# Altium PCB AX301_AX4010.PcbDoc (part 4 of 10)
Units mm, origin at the board's own origin, x right, y up, seen from the top; angles counter-clockwise.
Board outline 131.7 x 91.8 mm, 4 copper layers (Top Layer, GND, Mid-Layer 1, Bottom Layer); 191 components, 338 nets, 1108 pads, 420 vias.
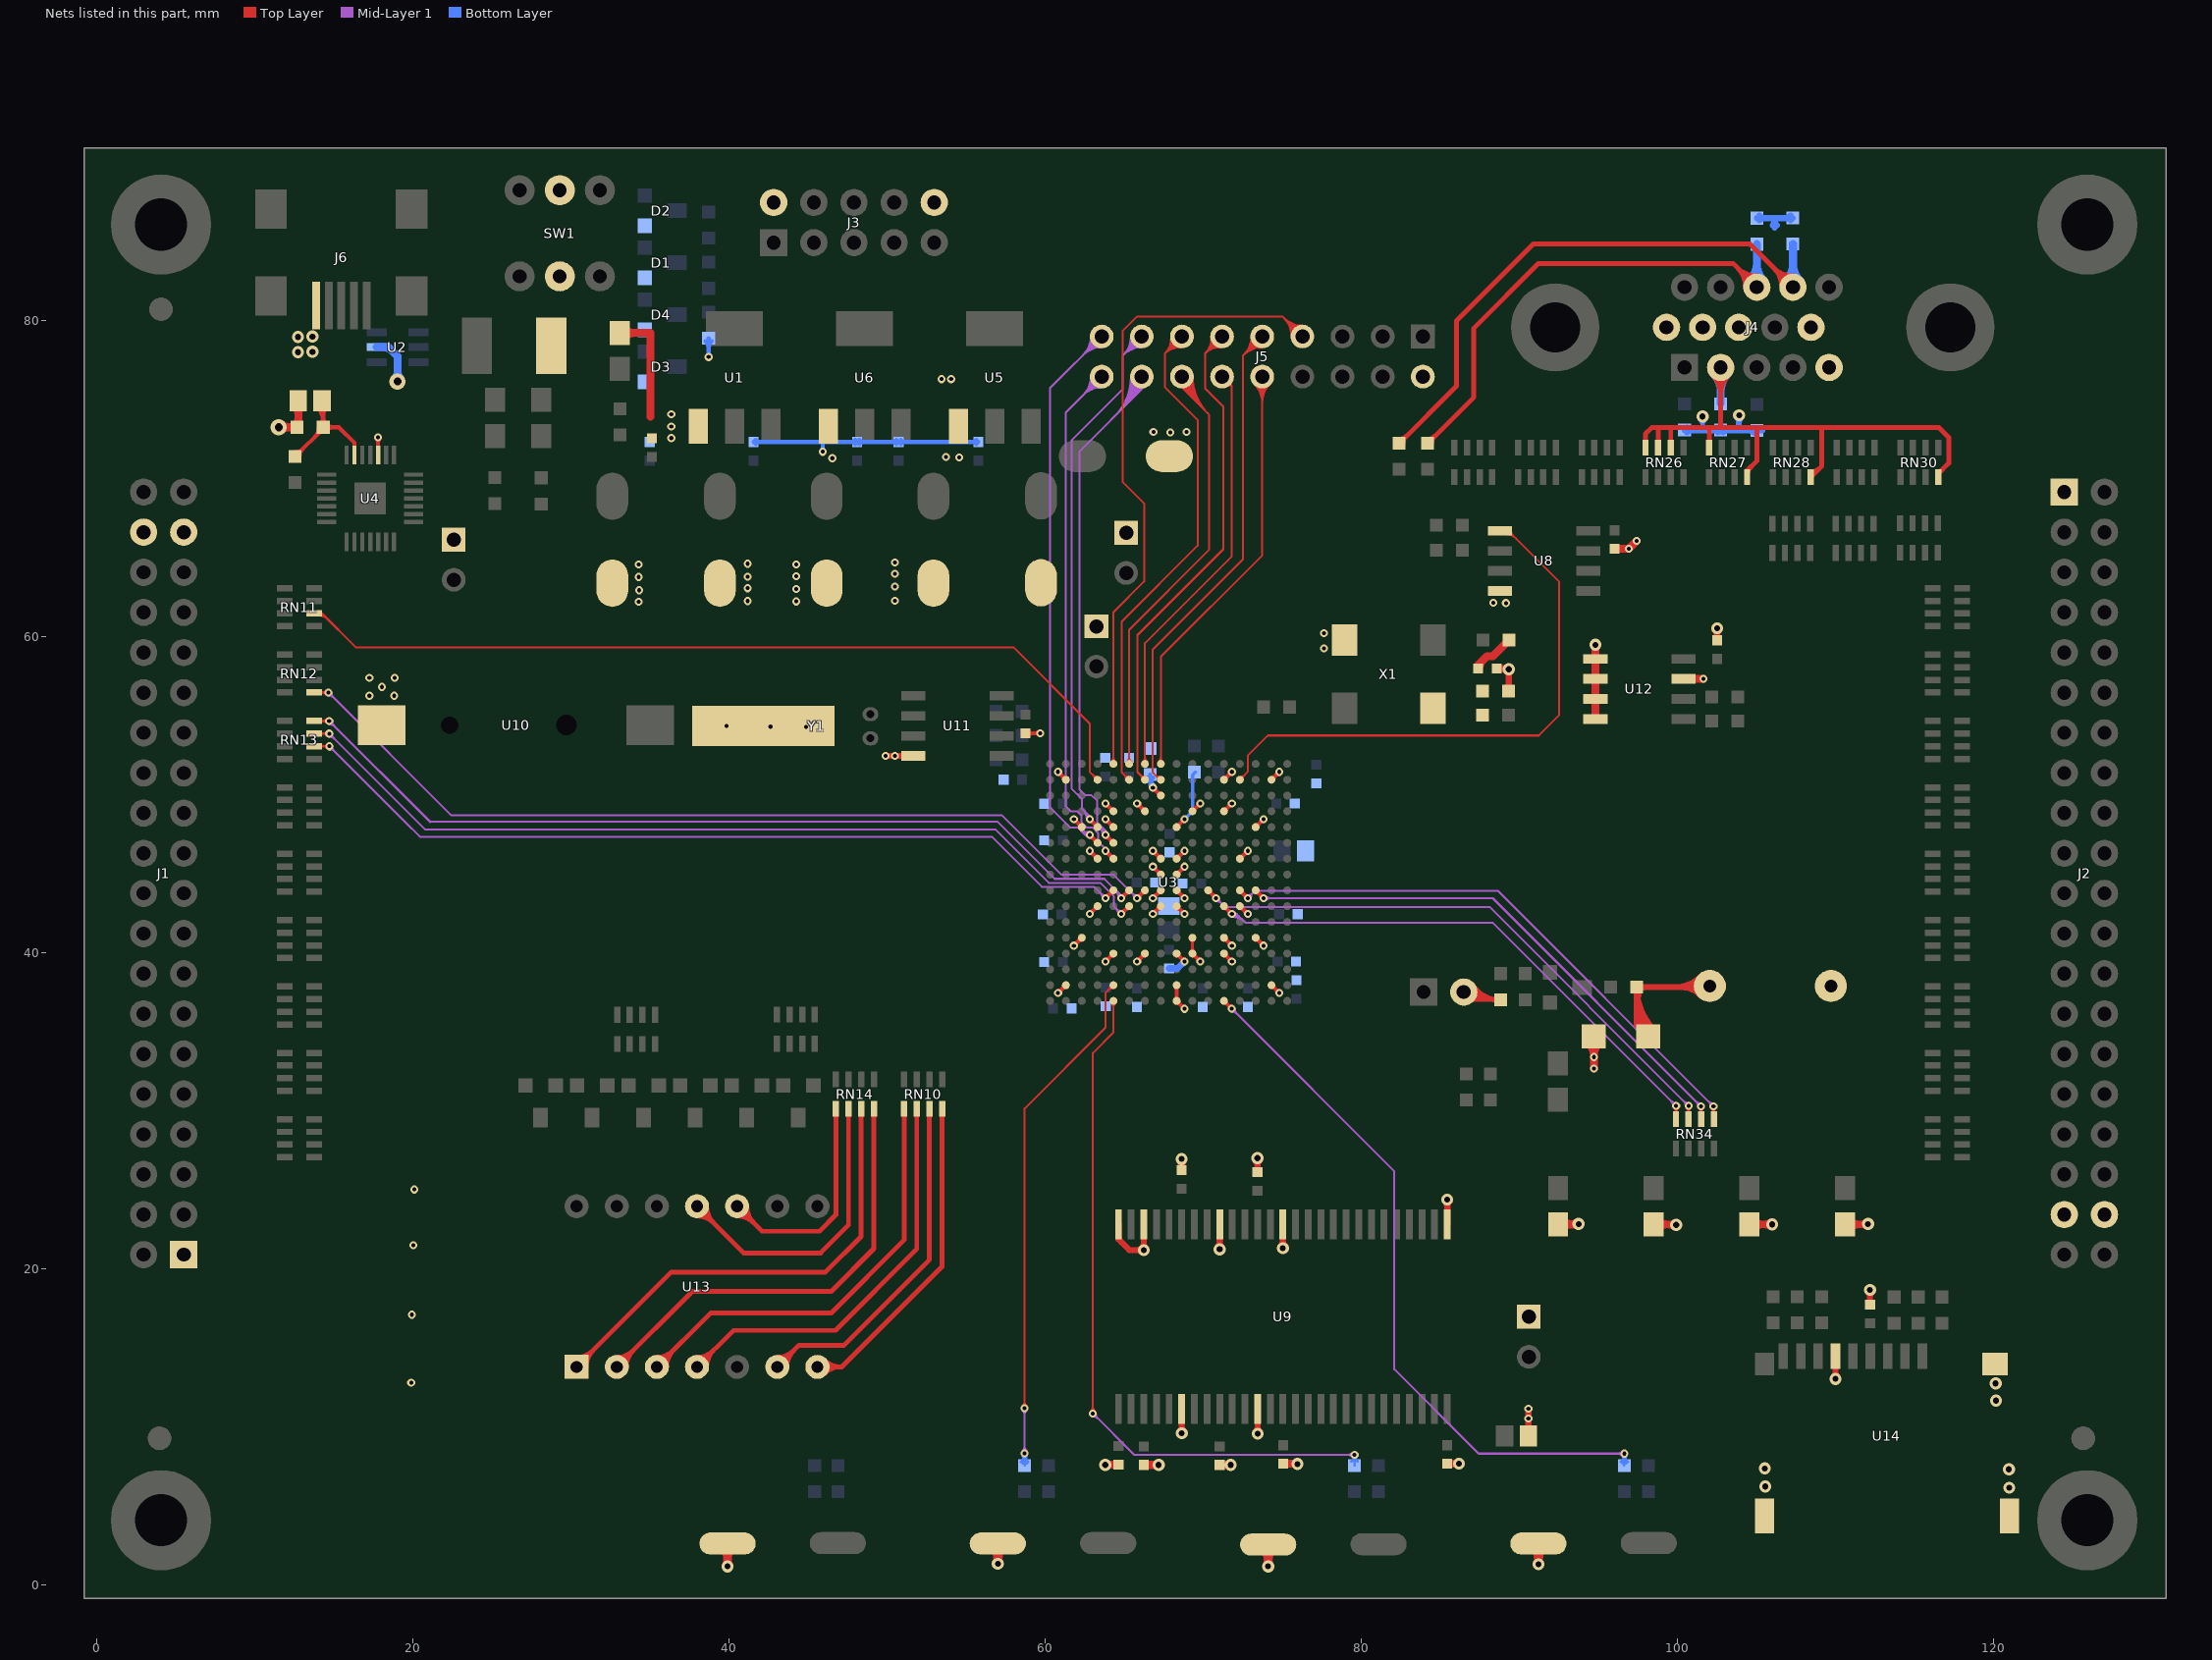
[diagram p6: the nets of this part, all layers, seen from the top]

## Via types
v1: diameter 0.508, hole 0.254, Top Layer to Bottom Layer, 377 vias
v2: diameter 0.762, hole 0.381, Top Layer to Bottom Layer, 41 vias
v3: diameter 1.016, hole 0.508, Top Layer to Bottom Layer, 2 vias

## Nets (pads, with @x,y where several pads share a name; then routed paths per layer and width w, separated by ;. In a path a pad name is that pad's centre, name@x,y a point inside that pad or via, vN(x,y) a via of type N, cw(c..) or ccw(c..) an arc to the next point about the centre after c; other vN are vias at no path point) (continued)
GND: C1.2 C2.2 C3.2 C4.2 C5.2 C6.2 C7.2 C8.2 C9.2 C10.2 C11.2 C12.2 C13.2 C14.2 C15.2 C16.2 C17.2 C18.2 C19.2 C20.2 C21.2 C22.2 C23.2 C24.1 C25.2 C26.2 C27.2 C28.2 C29.2 C30.2 C31.2 C32.2 C33.2 C34.2 C35.2 C36.2 C37.2 C38.2 C39.2 C40.2 C41.2 C42.2 C43.2 C44.2 C45.2 C46.2 C47.2 C48.2 C49.2 C50.2 D1.1 D2.1 D3.1 D4.1 D5.1 EC1.2 EC2.2 EC3.2 EC4.2 EC5.2 EC6.2 J1.1 J1.37 J1.38 J2.1 J2.37 J2.38 J3.2 J3.10 J4.5 J4.6 J4.7 J4.8 J4.10 J5.2 J6.5 K1.2 K2.2 K3.1 K4.2 LED0.2 LED1.2 LED2.2 LED3.2 LED6.2 LS1.2 P1.1 P2.1 P3.1 P4.1 R6.1 R12.2 U1.1 U2.2 U3.B2 U3.B15 U3.C5 U3.C12 U3.D7 U3.D10 U3.E2 U3.E4 U3.E12 U3.E13 U3.G4 U3.G12 U3.G13 U3.H7 U3.H8 U3.H9 U3.H10 U3.H13 U3.H15 U3.H16 U3.J7 U3.J8 U3.J9 U3.J10 U3.K4 U3.K13 U3.M4 U3.M5 U3.M13 U3.N7 U3.N10 U3.P5 U3.P12 U3.R2 U3.R15 U4.3 U5.1 U6.1 U8.4 U9.6 U9.12 U9.28 U9.41 U9.46 U9.52 U9.54 U10.2 U11.4 U12.1 U12.2 U12.3 U12.4 U12.7 U14.6 U14.11 U14.12 U14.13 X1.2 Y1.0 | length 213.2
  Top Layer w0.203: U3.G13@69.213,40.03 ccw(c68.96,40.283) 69.318,40.283 ccw(c69.676,40.283) U3.G13@69.423,40.03 ; U3.G12@69.213,40.82 cw(c68.96,40.566) 69.318,40.566 cw(c69.676,40.566) U3.G12@69.423,40.82 ; U3.G13@69.318,39.925 U3.G12@69.318,40.925
  Top Layer w0.254: v1@17.706,72.494 cw(c17.489,72.277) 17.796,72.277 cw(c18.103,72.277) v1@17.886,72.494 ; U4.3@17.796,71.476 v1(17.796,72.584) ; C36.2@58.75,53.867 v1(59.684,53.867) ; C36.2@58.885,53.732 cw(c59.21,53.407) 59.21,53.867 cw(c59.21,54.327) C36.2@58.885,54.002 ; v1@59.594,53.777 ccw(c59.377,53.561) 59.377,53.867 ccw(c59.377,54.174) v1@59.594,53.957 ; v1(60.818,37.425) U3.R15@61.318,37.925 ; v1@60.818,37.552 ccw(c60.818,37.858) 61.035,37.641 ccw(c61.252,37.425) v1@60.945,37.425 ; v1@60.818,51.298 cw(c60.818,50.991) 61.035,51.208 cw(c61.252,51.425) v1@60.945,51.425 ; v1(60.818,51.425) U3.R2@61.318,50.925 ; U3.R15@61.195,37.925 cw(c60.898,37.925) 61.108,37.715 cw(c61.318,37.505) U3.R15@61.318,37.802 ; U3.R2@61.195,50.925 ccw(c60.898,50.925) 61.108,51.135 ccw(c61.318,51.345) U3.R2@61.318,51.048 ; v1(61.818,40.425) U3.P12@62.318,40.925 ; v1@61.818,40.552 ccw(c61.818,40.858) 62.035,40.641 ccw(c62.252,40.425) v1@61.945,40.425 ; v1@61.818,48.298 cw(c61.818,47.991) 62.035,48.208 cw(c62.252,48.425) v1@61.945,48.425 ; v1(61.818,48.425) U3.P5@62.318,47.925 ; U3.P12@62.195,40.925 cw(c61.898,40.925) 62.108,40.715 cw(c62.318,40.505) U3.P12@62.318,40.802 ; U3.P5@62.195,47.925 ccw(c61.898,47.925) 62.108,48.135 ccw(c62.318,48.345) U3.P5@62.318,48.048 ; v1(62.818,42.425) U3.N10@63.318,42.925 ; v1@62.818,42.552 ccw(c62.818,42.858) 63.035,42.641 ccw(c63.252,42.425) v1@62.945,42.425 ; v1@62.818,46.298 cw(c62.818,45.991) 63.035,46.208 cw(c63.252,46.425) v1@62.945,46.425 ; v1(62.818,46.425) U3.N7@63.318,45.925 ; U3.N10@63.195,42.925 cw(c62.898,42.925) 63.108,42.715 cw(c63.318,42.505) U3.N10@63.318,42.802 ; U3.N7@63.195,45.925 ccw(c62.898,45.925) 63.108,46.135 ccw(c63.318,46.345) U3.N7@63.318,46.048 ; v1(63.818,39.425) U3.M13@64.318,39.925 ; v1@63.818,39.552 ccw(c63.818,39.858) 64.035,39.641 ccw(c64.252,39.425) v1@63.945,39.425 ; v1@63.818,48.298 cw(c63.818,47.991) 64.035,48.208 cw(c64.252,48.425) v1@63.945,48.425 ; v1(63.818,48.425) U3.M5@64.318,47.925 ; v1@63.818,49.298 cw(c63.818,48.991) 64.035,49.208 cw(c64.252,49.425) v1@63.945,49.425 ; v1(63.818,49.425) U3.M4@64.318,48.925 ; U3.M13@64.195,39.925 cw(c63.898,39.925) 64.108,39.715 cw(c64.318,39.505) U3.M13@64.318,39.802 ; U3.M5@64.195,47.925 ccw(c63.898,47.925) 64.108,48.135 ccw(c64.318,48.345) U3.M5@64.318,48.048 ; U3.M4@64.195,48.925 ccw(c63.898,48.925) 64.108,49.135 ccw(c64.318,49.345) U3.M4@64.318,49.048 ; v1(65.818,39.425) U3.K13@66.318,39.925 ; v1@65.818,39.552 ccw(c65.818,39.858) 66.035,39.641 ccw(c66.252,39.425) v1@65.945,39.425 ; v1@65.818,49.298 cw(c65.818,48.991) 66.035,49.208 cw(c66.252,49.425) v1@65.945,49.425 ; v1(65.818,49.425) U3.K4@66.318,48.925 ; U3.K13@66.195,39.925 cw(c65.898,39.925) 66.108,39.715 cw(c66.318,39.505) U3.K13@66.318,39.802 ; U3.K4@66.195,48.925 ccw(c65.898,48.925) 66.108,49.135 ccw(c66.318,49.345) U3.K4@66.318,49.048 ; v1(66.818,42.425) U3.J10@67.318,42.925 ; v1@66.818,42.552 ccw(c66.818,42.858) 67.035,42.641 ccw(c67.252,42.425) v1@66.945,42.425 ; v1(66.818,43.425) U3.J9@67.318,43.925 ; v1@66.818,43.552 ccw(c66.818,43.858) 67.035,43.641 ccw(c67.252,43.425) v1@66.945,43.425 ; v1@66.818,45.298 cw(c66.818,44.991) 67.035,45.208 cw(c67.252,45.425) v1@66.945,45.425 ; v1(66.818,45.425) U3.J8@67.318,44.925 ; v1@66.818,46.298 cw(c66.818,45.991) 67.035,46.208 cw(c67.252,46.425) v1@66.945,46.425 ; v1(66.818,46.425) U3.J7@67.318,45.925 ; U3.J10@67.195,42.925 cw(c66.898,42.925) 67.108,42.715 cw(c67.318,42.505) U3.J10@67.318,42.802 ; U3.J9@67.195,43.925 cw(c66.898,43.925) 67.108,43.715 cw(c67.318,43.505) U3.J9@67.318,43.802 ; U3.J8@67.195,44.925 ccw(c66.898,44.925) 67.108,45.135 ccw(c67.318,45.345) U3.J8@67.318,45.048 ; U3.J7@67.195,45.925 ccw(c66.898,45.925) 67.108,46.135 ccw(c67.318,46.345) U3.J7@67.318,46.048 ; U3.H16@68.231,37.012 ccw(c68.021,37.222) 68.318,37.222 ccw(c68.615,37.222) U3.H16@68.405,37.012 ; U3.H15@68.231,37.838 cw(c68.021,37.628) 68.318,37.628 cw(c68.615,37.628) U3.H15@68.405,37.838 ; U3.H16@68.318,36.802 cw(c68.318,36.505) 68.528,36.715 cw(c68.738,36.925) U3.H16@68.441,36.925 ; U3.H15@68.318,37.925 U3.H16@68.318,36.925 v1(68.818,36.425) ; U3.H13@68.318,39.802 cw(c68.318,39.505) 68.528,39.715 cw(c68.738,39.925) U3.H13@68.441,39.925 ; U3.H13@68.318,39.925 v1(68.818,39.425) ; U3.H10@68.318,42.802 cw(c68.318,42.505) 68.528,42.715 cw(c68.738,42.925) U3.H10@68.441,42.925 ; U3.H10@68.318,42.925 v1(68.818,42.425) ; U3.H9@68.318,43.802 cw(c68.318,43.505) 68.528,43.715 cw(c68.738,43.925) U3.H9@68.441,43.925 ; U3.H9@68.318,43.925 v1(68.818,43.425) ; U3.H8@68.318,44.925 v1(68.818,45.425) ; U3.H8@68.318,45.048 ccw(c68.318,45.345) 68.528,45.135 ccw(c68.738,44.925) U3.H8@68.441,44.925 ; U3.H7@68.318,45.925 v1(68.818,46.425) ; U3.H7@68.318,46.048 ccw(c68.318,46.345) 68.528,46.135 ccw(c68.738,45.925) U3.H7@68.441,45.925 ; v1@68.691,36.425 ccw(c68.384,36.425) 68.601,36.641 ccw(c68.818,36.858) v1@68.818,36.552 ; v1@68.691,39.425 ccw(c68.384,39.425) 68.601,39.641 ccw(c68.818,39.858) v1@68.818,39.552 ; v1@68.691,42.425 ccw(c68.384,42.425) 68.601,42.641 ccw(c68.818,42.858) v1@68.818,42.552 ; v1@68.691,43.425 ccw(c68.384,43.425) 68.601,43.641 ccw(c68.818,43.858) v1@68.818,43.552 ; v1@68.691,45.425 cw(c68.384,45.425) 68.601,45.208 cw(c68.818,44.991) v1@68.818,45.298 ; v1@68.691,46.425 cw(c68.384,46.425) 68.601,46.208 cw(c68.818,45.991) v1@68.818,46.298 ; U3.G13@69.318,39.802 cw(c69.318,39.505) 69.528,39.715 cw(c69.738,39.925) U3.G13@69.441,39.925 ; U3.G13@69.318,39.925 v1(69.818,39.425) ; U3.G4@69.318,48.925 v1(69.818,49.425) ; U3.G4@69.318,49.048 ccw(c69.318,49.345) 69.528,49.135 ccw(c69.738,48.925) U3.G4@69.441,48.925 ; v1@69.691,39.425 ccw(c69.384,39.425) 69.601,39.641 ccw(c69.818,39.858) v1@69.818,39.552 ; v1@69.691,49.425 cw(c69.384,49.425) 69.601,49.208 cw(c69.818,48.991) v1@69.818,49.298 ; U3.E13@71.318,39.802 cw(c71.318,39.505) 71.528,39.715 cw(c71.738,39.925) U3.E13@71.441,39.925 ; U3.E13@71.318,39.925 v1(71.818,39.425) ; U3.E12@71.318,40.802 cw(c71.318,40.505) 71.528,40.715 cw(c71.738,40.925) U3.E12@71.441,40.925 ; U3.E12@71.318,40.925 v1(71.818,40.425) ; U3.E4@71.318,48.925 v1(71.818,49.425) ; U3.E4@71.318,49.048 ccw(c71.318,49.345) 71.528,49.135 ccw(c71.738,48.925) U3.E4@71.441,48.925 ; U3.E2@71.318,50.925 v1(71.818,51.425) ; U3.E2@71.318,51.048 ccw(c71.318,51.345) 71.528,51.135 ccw(c71.738,50.925) U3.E2@71.441,50.925 ; v1@71.691,39.425 ccw(c71.384,39.425) 71.601,39.641 ccw(c71.818,39.858) v1@71.818,39.552 ; v1@71.691,40.425 ccw(c71.384,40.425) 71.601,40.641 ccw(c71.818,40.858) v1@71.818,40.552 ; v1@71.691,49.425 cw(c71.384,49.425) 71.601,49.208 cw(c71.818,48.991) v1@71.818,49.298 ; v1@71.691,51.425 cw(c71.384,51.425) 71.601,51.208 cw(c71.818,50.991) v1@71.818,51.298 ; U3.D10@72.318,42.802 cw(c72.318,42.505) 72.528,42.715 cw(c72.738,42.925) U3.D10@72.441,42.925 ; U3.D10@72.318,42.925 v1(72.818,42.425) ; U3.D7@72.318,45.925 v1(72.818,46.425) ; U3.D7@72.318,46.048 ccw(c72.318,46.345) 72.528,46.135 ccw(c72.738,45.925) U3.D7@72.441,45.925 ; v1@72.691,42.425 ccw(c72.384,42.425) 72.601,42.641 ccw(c72.818,42.858) v1@72.818,42.552 ; v1@72.691,46.425 cw(c72.384,46.425) 72.601,46.208 cw(c72.818,45.991) v1@72.818,46.298 ; U3.C12@73.318,40.802 cw(c73.318,40.505) 73.528,40.715 cw(c73.738,40.925) U3.C12@73.441,40.925 ; U3.C12@73.318,40.925 v1(73.818,40.425) ; U3.C5@73.318,47.925 v1(73.818,48.425) ; U3.C5@73.318,48.048 ccw(c73.318,48.345) 73.528,48.135 ccw(c73.738,47.925) U3.C5@73.441,47.925 ; v1@73.691,40.425 ccw(c73.384,40.425) 73.601,40.641 ccw(c73.818,40.858) v1@73.818,40.552 ; v1@73.691,48.425 cw(c73.384,48.425) 73.601,48.208 cw(c73.818,47.991) v1@73.818,48.298 ; U3.B15@74.318,37.802 cw(c74.318,37.505) 74.528,37.715 cw(c74.738,37.925) U3.B15@74.441,37.925 ; U3.B15@74.318,37.925 v1(74.818,37.425) ; U3.B2@74.318,50.925 v1(74.818,51.425) ; U3.B2@74.318,51.048 ccw(c74.318,51.345) 74.528,51.135 ccw(c74.738,50.925) U3.B2@74.441,50.925 ; v1@74.691,37.425 ccw(c74.384,37.425) 74.601,37.641 ccw(c74.818,37.858) v1@74.818,37.552 ; v1@74.691,51.425 cw(c74.384,51.425) 74.601,51.208 cw(c74.818,50.991) v1@74.818,51.298 ; LED1.2@98.51,22.784 v2@99.898,22.784 ; LED1.2@98.869,22.425 cw(c99.736,21.557) 99.736,22.784 cw(c99.736,24.01) LED1.2@98.869,23.143 ; 99.245,22.652 cw(c99.406,22.051) v2@99.774,22.553 ; 99.249,22.784 cw(c99.249,22.084) v2@99.744,22.579 ; 99.269,22.909 ccw(c99.449,23.58) v2@99.797,22.978 ; 99.372,22.784 ccw(c99.372,23.31) v2@99.744,22.938 ; 99.381,22.879 cw(c99.244,22.366) v2@99.704,22.631 ; 99.483,22.716 ccw(c99.389,23.067) v2@99.704,22.885 ; LED2.2@104.563,22.784 v2(105.994,22.784) ; LED2.2@104.923,22.425 cw(c105.79,21.557) 105.79,22.784 cw(c105.79,24.01) LED2.2@104.923,23.143 ; 105.265,22.643 cw(c105.47,21.877) v2@105.867,22.564 ; 105.265,22.924 ccw(c105.47,23.69) v2@105.867,23.004 ; 105.512,22.709 ccw(c105.4,23.127) v2@105.774,22.911 ; 105.512,22.858 cw(c105.4,22.441) v2@105.774,22.657 ; v2@105.815,22.604 ccw(c105.381,22.171) 105.381,22.784 ccw(c105.381,23.397) v2@105.815,22.963 ; LED3.2@110.617,22.784 v2@112.039,22.784 ; LED3.2@110.976,22.425 cw(c111.843,21.557) 111.843,22.784 cw(c111.843,24.01) LED3.2@110.976,23.143 ; 111.367,22.911 ccw(c111.534,23.534) v2@111.915,23.014 ; 111.388,22.662 cw(c111.575,21.961) v2@111.938,22.589 ; 111.39,22.784 ccw(c111.39,23.484) v2@111.885,22.989 ; 111.513,22.784 cw(c111.513,22.257) v2@111.885,22.63 ; 111.54,22.703 ccw(c111.411,23.187) v2@111.845,22.936 ; 111.642,22.838 cw(c111.556,22.515) v2@111.845,22.682
  Top Layer w0.381: v1(49.911,52.426) U11.4@51.664,52.426 ; U9.54@64.643,22.784 64.643,21.844 65.329,21.158 v2(66.243,21.158) U9.52@66.243,22.784 ; U9.54@64.668,22.047 ccw(c65.22,22.047) 64.83,21.657 ; v2@66.108,21.023 ccw(c65.783,20.698) 65.783,21.158 ccw(c65.783,21.618) 66.108,21.293 ccw(c65.784,21.618) 66.243,21.618 ; 66.243,21.619 ccw(c66.704,21.619) v2@66.378,21.293 ; v2@68.508,9.698 ccw(c68.183,10.024) 68.643,10.024 ccw(c69.103,10.024) v2@68.778,9.698 ; v2(68.643,9.564) U9.6@68.643,11.1 ; v2@73.308,9.674 ccw(c72.983,9.999) 73.443,9.999 ccw(c73.903,9.999) v2@73.578,9.674 ; v2(73.443,9.539) U9.12@73.443,11.1 ; v2@74.908,21.42 ccw(c74.583,21.745) 75.043,21.745 ccw(c75.503,21.745) v2@75.178,21.42 ; v2(75.043,21.285) U9.41@75.043,23.052 ; C46.2@89.179,56.693 ccw(c88.811,57.062) 89.332,57.062 ccw(c89.853,57.062) C46.2@89.484,56.693 ; v2@89.197,57.777 cw(c88.872,57.452) 89.332,57.452 cw(c89.792,57.452) v2@89.467,57.777 ; C46.2@89.332,56.54 v2(89.332,57.912) ; C50.2@90.578,9.398 v1(90.578,10.492) v1(90.578,11.127) ; LED0.2@92.456,22.784 v2@93.726,22.784 ; LED0.2@92.77,22.469 cw(c93.529,21.711) 93.529,22.784 cw(c93.529,23.857) LED0.2@92.77,23.098 ; 93.13,22.891 ccw(c93.299,23.523) v2@93.649,22.97 ; 93.222,22.701 cw(c93.37,22.148) v2@93.656,22.644 ; 93.23,22.784 ccw(c93.23,23.33) v2@93.617,22.944 ; 93.353,22.784 cw(c93.353,22.411) v2@93.617,22.674 ; 93.376,22.743 ccw(c93.286,23.078) v2@93.586,22.904 ; v2@109.874,13.141 ccw(c109.549,13.466) 110.009,13.466 ccw(c110.469,13.466) v2@110.143,13.141 ; v2(110.009,13.006) U14.6@110.009,14.448 ; v2@112.057,18.509 cw(c111.732,18.184) 112.192,18.184 cw(c112.652,18.184) v2@112.327,18.509 ; C43.2@112.192,17.71 v2(112.192,18.644)
  Top Layer w0.406: K1.2@39.552,2.24 cw(c38.704,1.391) 39.903,1.391 cw(c41.103,1.391) K1.2@40.255,2.24 ; v2@39.749,1.232 ccw(c39.188,1.556) 39.814,1.724 ; v2@39.778,1.269 ccw(c39.474,1.572) 39.903,1.572 ccw(c40.333,1.572) v2@40.029,1.269 ; v2(39.903,1.143) K1.2@39.903,2.591 ; 39.993,1.724 ccw(c40.619,1.556) v2@40.057,1.232 ; K2.2@56.655,2.24 cw(c55.807,1.391) 57.006,1.391 cw(c58.205,1.391) K2.2@57.357,2.24 ; v2@56.852,1.401 ccw(c56.42,1.651) 56.902,1.78 ; v2@56.88,1.438 ccw(c56.577,1.742) 57.006,1.742 ccw(c57.435,1.742) v2@57.132,1.438 ; v2(57.006,1.312) K2.2@57.006,2.591 ; 57.11,1.78 ccw(c57.592,1.651) v2@57.16,1.401 ; v2@70.918,21.335 ccw(c70.616,21.636) 71.043,21.636 ; v2(71.044,21.209) U9.46@71.043,22.784 ; 71.043,21.64 ccw(c71.475,21.64) v2@71.17,21.335 ; v2@73.306,26.849 cw(c73.002,26.546) 73.431,26.546 cw(c73.861,26.546) v2@73.557,26.849 ; C35.2@73.431,26.092 v2(73.431,26.975) ; K3.1@73.757,2.169 cw(c72.909,1.32) 74.109,1.32 cw(c75.308,1.32) K3.1@74.46,2.169 ; v2@73.955,1.232 ccw(c73.447,1.525) 74.013,1.677 ; v2@73.983,1.269 ccw(c73.679,1.572) 74.109,1.572 ccw(c74.538,1.572) v2@74.234,1.269 ; v2(74.109,1.143) K3.1@74.109,2.52 ; 74.204,1.677 ccw(c74.77,1.525) v2@74.263,1.232 ; v2@85.317,24.235 cw(c85.014,23.932) 85.443,23.932 cw(c85.872,23.932) v2@85.569,24.235 ; U9.28@85.443,22.784 v2(85.443,24.361) ; C3.2@88.576,57.963 89.281,57.963 v2(89.332,57.912) ; C3.2@88.78,57.963 cw(c88.78,57.36) v2@89.206,57.786 ; K4.2@90.86,2.24 cw(c90.012,1.391) 91.211,1.391 cw(c92.411,1.391) K4.2@91.563,2.24 ; v2@91.057,1.359 ccw(c90.593,1.627) 91.111,1.766 ; v2@91.086,1.396 ccw(c90.782,1.699) 91.211,1.699 ccw(c91.641,1.699) v2@91.337,1.396 ; v2(91.211,1.27) K4.2@91.211,2.591 ; 91.312,1.766 ccw(c91.83,1.627) v2@91.365,1.359 ; v2@102.389,60.377 cw(c102.085,60.074) 102.514,60.074 cw(c102.944,60.074) v2@102.64,60.377 ; C37.2@102.514,59.747 v2(102.514,60.503)
  Top Layer w0.5: v3(11.506,73.228) C1.2@12.675,73.228 12.749,73.228 C2.2@12.749,74.905 ; v3@11.689,73.046 cw(c12.129,72.605) 12.129,73.228 cw(c12.129,73.851) v3@11.689,73.411 ; C2.2@12.537,74.562 cw(c12.025,74.05) 12.749,74.05 cw(c13.474,74.05) C2.2@12.962,74.562 ; C1.2@12.564,73.339 ccw(c12.116,73.786) 12.749,73.786
  Top Layer w0.508: LED6.2@33.096,79.197 35.027,79.197 35.027,73.889 ; LED6.2@33.366,78.928 cw(c34.016,78.277) 34.016,79.197 cw(c34.016,80.117) LED6.2@33.366,79.467 ; v2@63.805,7.588 C30.2@64.643,7.588 ; C29.2@66.243,7.563 66.243,7.569 v2(67.183,7.569) ; C34.2@68.631,26.219 v2(68.631,26.924) ; C31.2@71.044,7.563 v2(71.736,7.563) ; C32.2@75.057,7.639 v2@75.965,7.639 ; C33.2@85.446,7.639 v2(86.176,7.639) ; D5.1@94.357,34.312 cw(c93.49,33.445) 94.717,33.445 cw(c95.943,33.445) D5.1@95.076,34.312 ; v1(94.717,32.639) v1(94.717,33.376) D5.1@94.717,34.671 ; U12.4@94.818,54.762 U12.3@94.818,56.032 U12.2@94.818,57.302 v2(94.818,59.461) ; C24.1@96.037,65.532 v1(96.926,65.532) v1(97.434,66.04) ; U12.7@100.406,57.302 v1(101.651,57.302)
  Bottom Layer w0.254: R6.1@38.512,78.669 cw(c38.035,78.192) 38.71,78.192 cw(c39.384,78.192) R6.1@38.907,78.669 ; v1@38.62,77.763 ccw(c38.403,77.98) 38.71,77.98 ccw(c39.016,77.98) v1@38.799,77.763 ; v1(38.71,77.673) R6.1@38.71,78.867 ; C45.2@41.554,72.295 45.923,72.295 ; C45.2@41.689,72.16 cw(c42.014,71.835) 42.014,72.295 cw(c42.014,72.755) C45.2@41.689,72.429 ; v1@45.833,71.769 ccw(c45.617,71.985) 45.923,71.985 ccw(c46.23,71.985) v1@46.013,71.769 ; v1(45.923,71.679) 45.923,72.295 ; C4.2@47.973,72.16 ccw(c47.648,71.835) 47.648,72.295 ccw(c47.648,72.755) C4.2@47.973,72.429 ; C4.2@48.242,72.16 cw(c48.568,71.835) 48.568,72.295 cw(c48.568,72.755) C4.2@48.242,72.429 ; C21.2@50.589,72.16 ccw(c50.264,71.835) 50.264,72.295 ccw(c50.264,72.755) C21.2@50.589,72.429 ; C21.2@50.859,72.16 cw(c51.184,71.835) 51.184,72.295 cw(c51.184,72.755) C21.2@50.859,72.429 ; C48.2@55.644,72.16 ccw(c55.318,71.835) 55.318,72.295 ccw(c55.318,72.755) C48.2@55.644,72.429 ; C48.2@55.778,72.295 C21.2@50.724,72.295 C4.2@48.108,72.295 45.923,72.295 ; v2@101.42,73.734 cw(c100.987,73.301) 101.6,73.301 cw(c102.213,73.301) v2@101.78,73.734 ; 101.6,73.025 v2(101.6,73.914)
  Bottom Layer w0.381: C38.2@100.482,73.025 101.6,73.025 103.886,73.025 ; C38.2@100.61,72.898 cw(c100.917,72.59) 100.917,73.025 ; C38.2@100.61,73.203 ccw(c101.04,73.633) 101.04,73.025 ; 102.16,73.025 ccw(c102.16,73.633) C39.2@102.59,73.203 ; 102.283,73.025 cw(c102.283,72.59) C39.2@102.59,72.898 ; C39.2@102.896,72.898 cw(c103.203,72.59) 103.203,73.025 ; C39.2@102.896,73.203 ccw(c103.326,73.633) 103.326,73.025 ; v2@103.777,73.855 cw(c103.513,73.592) 103.886,73.592 ; 103.886,73.469 cw(c104.433,73.469) v2@104.046,73.855 ; v2@103.886,73.965 103.886,73.025 ; C40.2@104.876,72.872 ccw(c104.508,72.504) 104.508,73.025 ccw(c104.508,73.546) C40.2@104.876,73.178 ; C41.2@105.029,86.462 106.159,86.462 ; C41.2@105.182,86.309 cw(c105.55,85.94) 105.55,86.462 cw(c105.55,86.983) C41.2@105.182,86.614 ; C40.2@105.385,73.025 C40.2@105.029,73.025 103.886,73.025 ; 106.025,85.999 ccw(c105.699,86.325) 106.159,86.325 ccw(c106.619,86.325) 106.294,85.999 ; 106.159,85.865 106.159,86.462 ; 106.732,86.462 ccw(c106.732,87.07) C42.2@107.162,86.64 ; 106.855,86.462 cw(c106.855,86.027) C42.2@107.162,86.334 ; C42.2@107.29,86.462 106.159,86.462
  Bottom Layer w0.406: C8.2@67.843,38.983 68.376,38.983 v1(68.818,39.425)
  Bottom Layer w0.5: U2.2@17.704,78.293 18.456,78.293 19.025,77.724 v3(19.025,76.124) ; U2.2@18.089,78.293 cw(c18.089,77.408) 18.715,78.034 ; v3@18.842,76.306 ccw(c18.402,76.747) 19.025,76.747 ccw(c19.647,76.747) v3@19.207,76.306
  other v1: 19.888,12.776 19.939,17.069 20.015,21.463 20.091,24.994 50.495,52.426 44.882,54.254 42.621,54.28 39.853,54.331 17.247,56.236 18.821,56.236 18.034,56.794 17.247,57.379 18.847,57.379 77.648,59.233 77.648,60.198 89.154,62.103 88.367,62.128 34.29,62.179 44.247,62.205 41.173,62.23 50.495,62.255 34.315,62.916 44.247,62.992 41.173,63.043 50.495,63.144 34.29,63.754 41.173,63.779 44.247,63.805 50.495,63.957 34.29,64.541 44.247,64.541 41.173,64.592 50.495,64.668 46.533,71.272 54.559,71.323 53.721,71.349 36.347,72.542 67.92,72.898 66.853,72.923 68.936,72.923 36.347,73.279 36.347,74.041 53.442,76.276 54.051,76.276
  other v2: 121.006,6.121 105.562,6.198 120.98,7.29 105.537,7.341 63.805,7.569 75.971,7.62 120.167,11.633 120.142,12.725 99.924,22.758 93.751,22.809 112.065,22.809 103.911,73.99 12.725,77.978 13.64,78.003 12.725,78.943 13.64,78.969
GREEN: C39.1 J4.2 RN26.2 RN26.3 RN26.4 RN27.4 RN27.8 RN28.8 RN30.8 | length 47.7
  Top Layer w0.305: RN26.4@97.984,71.933 97.984,72.813 98.374,73.203 105.029,73.203 ; RN26.3@98.784,71.933 98.784,73.156 ; RN26.2@99.584,71.933 99.584,73.194 ; RN27.4@102.016,71.933 102.016,73.161 ; J4.2@102.24,76.51 cw(c101.026,75.296) 102.743,75.296 cw(c104.46,75.296) J4.2@103.246,76.51 ; J4.2@102.456,76.725 cw(c101.762,76.032) 102.743,76.032 cw(c103.724,76.032) J4.2@103.03,76.725 ; 102.743,73.228 J4.2@102.743,77.013 ; RN27.8@104.416,70.075 104.416,70.481 105.029,71.095 105.029,73.203 ; RN27.8@104.463,70.375 cw(c104.836,70.375) 104.572,70.638 ; RN28.8@108.447,70.075 109.144,70.771 109.144,73.203 ; RN28.8@108.447,70.118 ccw(c108.447,70.221) RN28.8@108.52,70.148 ; RN28.8@108.447,70.422 ccw(c108.447,71.262) 109.04,70.668 ; RN30.8@116.51,70.075 116.51,70.294 117.17,70.955 117.17,72.593 116.561,73.203 109.144,73.203 ; RN30.8@116.51,70.422 ccw(c116.51,70.731) 116.728,70.513 ; 105.029,73.203 109.144,73.203
  Bottom Layer w0.508: J4.2@102.312,76.582 cw(c101.271,75.541) 102.743,75.541 cw(c104.215,75.541) J4.2@103.174,76.582 ; C39.1@102.743,74.752 J4.2@102.743,77.013
J1: J5.10 U3.J1 | length 34.2
  Top Layer w0.127: U3.J1@67.186,52.056 ccw(c66.868,52.375) 67.318,52.375 ccw(c67.768,52.375) U3.J1@67.45,52.056 ; U3.J1@67.318,51.925 67.318,58.707 73.736,65.126 J5.10@73.736,76.433 ; J5.10@73.251,75.948 cw(c72.079,74.776) 73.736,74.776 cw(c75.394,74.776) J5.10@74.222,75.948 ; J5.10@73.341,76.037 cw(c72.385,75.082) 73.736,75.082 cw(c75.087,75.082) J5.10@74.132,76.037 ; J5.10@73.43,76.127 cw(c72.692,75.389) 73.736,75.389 cw(c74.78,75.389) J5.10@74.042,76.127
J2: J5.9 U3.J2 | length 38.2
  Top Layer w0.127: U3.J2@67.132,50.911 ccw(c66.706,50.879) 66.98,51.207 ; U3.J2@67.298,51.11 cw(c67.253,51.535) 66.98,51.207 ; U3.J2@67.318,50.925 66.98,51.207 ; J5.9@73.05,78.973 cw(c71.392,78.973) 72.564,77.801 cw(c73.736,76.629) J5.9@73.736,78.287 ; J5.9@73.177,78.973 cw(c71.826,78.973) 72.781,78.018 cw(c73.736,77.063) J5.9@73.736,78.414 ; J5.9@73.304,78.973 cw(c72.26,78.973) 72.998,78.235 cw(c73.736,77.496) J5.9@73.736,78.541 ; J5.9@73.736,78.973 72.517,77.754 72.517,64.872 66.802,59.157 66.802,51.384 66.98,51.207
K1: J5.12 U3.K1 | length 28.3
  Top Layer w0.127: U3.K1@66.186,52.056 ccw(c65.868,52.375) 66.318,52.375 ccw(c66.768,52.375) U3.K1@66.45,52.056 ; U3.K1@66.318,51.925 66.318,59.562 71.806,65.049 71.806,75.823 ; J5.12@71.196,76.433 71.806,75.823 ; J5.12@71.561,75.851 cw(c71.666,75.683) 71.806,75.823 ; J5.12@71.778,76.069 ccw(c71.946,75.963) 71.806,75.823
K2: J5.11 U3.K2 | length 37.6
  Top Layer w0.127: U3.K2@66.132,50.925 ccw(c65.681,50.925) 66,51.243 ccw(c66.318,51.561) U3.K2@66.318,51.111 ; U3.K2@66.318,50.925 65.837,51.406 65.837,60.071 71.272,65.507 71.272,74.524 70.129,75.667 70.129,77.906 J5.11@71.196,78.973 ; J5.11@70.511,78.926 cw(c69.2,78.836) 70.129,77.906 cw(c71.059,76.977) J5.11@71.149,78.288 ; J5.11@70.638,78.935 cw(c69.569,78.861) 70.327,78.104 cw(c71.084,77.346) J5.11@71.158,78.415 ; J5.11@70.765,78.943 cw(c69.939,78.886) 70.524,78.301 cw(c71.11,77.715) J5.11@71.167,78.542
K9: RN12.5 U3.K9 | length 61.8
  Top Layer w0.127: RN12.5@13.745,56.442 v1(14.659,56.442) ; RN12.5@14.142,56.346 cw(c14.375,56.113) 14.375,56.442 cw(c14.375,56.772) RN12.5@14.142,56.539 ; v1@14.525,56.308 ccw(c14.199,55.982) 14.199,56.442 ccw(c14.199,56.902) v1@14.525,56.577
  Top Layer w0.254: v1(65.818,43.425) U3.K9@66.318,43.925 ; v1@65.818,43.552 ccw(c65.818,43.858) 66.035,43.641 ccw(c66.252,43.425) v1@65.945,43.425 ; U3.K9@66.195,43.925 cw(c65.898,43.925) 66.108,43.715 cw(c66.318,43.505) U3.K9@66.318,43.802
  Mid-Layer 1 w0.127: v1@14.659,56.252 cw(c14.659,55.792) 14.984,56.117 cw(c15.31,56.442) v1@14.85,56.442 ; v1(14.659,56.442) 22.435,48.666 57.277,48.666 61.036,44.907 64.335,44.907 v1(65.818,43.425) ; v1@65.627,43.425 ccw(c65.168,43.425) 65.493,43.75 ccw(c65.818,44.075) v1@65.818,43.615
KEY1: R44.1 U3.M15 | length 39.4
  Top Layer w0.127: v1@58.565,11.285 ccw(c58.239,11.611) 58.699,11.611 ccw(c59.159,11.611) v1@58.834,11.285 ; v1(58.699,11.151) 58.699,30.124 63.83,35.255 63.83,37.437 U3.M15@64.318,37.925 ; U3.M15@64.131,37.925 cw(c63.681,37.925) 64,37.606 cw(c64.318,37.288) U3.M15@64.318,37.738
  Mid-Layer 1 w0.127: v1@58.565,8.441 ccw(c58.239,8.766) 58.699,8.766 ccw(c59.159,8.766) v1@58.834,8.441 ; v1@58.565,11.016 cw(c58.239,10.691) 58.699,10.691 cw(c59.159,10.691) v1@58.834,11.016 ; v1(58.699,8.306) v1(58.699,11.151)
  Bottom Layer w0.152: R44.1@58.468,7.754 ccw(c57.926,8.306) v1(58.699,8.306) ; v1@58.55,8.209 cw(c58.246,8.013) 58.596,7.919 cw(c58.946,7.825) v1@58.78,8.148 ; v1@58.574,8.18 cw(c58.27,7.877) 58.699,7.877 cw(c59.129,7.877) v1@58.825,8.18 ; R44.1@58.575,7.645 ccw(c58.283,7.942) 58.699,7.942 ccw(c59.116,7.942) R44.1@58.824,7.645 ; v1@58.618,8.148 cw(c58.453,7.825) 58.803,7.919 cw(c59.153,8.013) v1@58.849,8.209 ; R44.1@58.699,7.518 v1(58.699,8.306) ; R44.1@58.931,7.754 cw(c59.473,8.306) v1(58.699,8.306)
KEY2: R40.1 U3.M16 | length 50.1
  Top Layer w0.127: v1@62.883,10.955 ccw(c62.557,11.28) 63.017,11.28 ccw(c63.477,11.28) v1@63.152,10.955 ; v1(63.017,10.82) 63.017,33.63 64.318,34.93 U3.M16@64.318,36.925 ; U3.M16@64.186,36.793 cw(c63.868,36.474) 64.318,36.474 cw(c64.768,36.474) U3.M16@64.45,36.793
  Mid-Layer 1 w0.127: v1@63.017,10.63 cw(c63.017,10.17) 63.343,10.495 cw(c63.668,10.82) v1@63.208,10.82 ; v1(63.017,10.82) 65.634,8.204 v1(79.578,8.204) ; v1@79.443,8.069 ccw(c79.118,7.744) 79.118,8.204 ccw(c79.118,8.664) v1@79.443,8.339
  Bottom Layer w0.152: R40.1@79.372,7.777 ccw(c79.031,8.204) v1(79.578,8.204) ; v1@79.452,8.078 cw(c79.149,7.775) 79.578,7.775 cw(c80.007,7.775) v1@79.704,8.078 ; v1@79.462,8.07 cw(c79.373,7.966) 79.505,7.931 cw(c79.637,7.895) v1@79.611,8.03 ; v1@79.545,8.03 cw(c79.52,7.895) 79.651,7.931 cw(c79.783,7.966) v1@79.694,8.07 ; R40.1@79.578,7.518 v1(79.578,8.204) ; R40.1@79.784,7.777 cw(c80.125,8.204) v1(79.578,8.204)
KEY3: R39.1 U3.E16 | length 53.4
  Top Layer w0.127: U3.E16@71.318,36.738 cw(c71.318,36.288) 71.636,36.606 cw(c71.955,36.925) U3.E16@71.505,36.925 ; U3.E16@71.318,36.925 v1(71.806,36.437) ; U3.E16@71.404,36.741 cw(c71.188,36.367) v1@71.617,36.415 ; U3.E16@71.502,36.839 ccw(c71.876,37.055) v1@71.827,36.626 ; 71.568,36.646 ccw(c71.692,36.861) v1@71.756,36.621 ; 71.597,36.674 cw(c71.382,36.55) v1@71.622,36.486 ; v1@71.615,36.437 ccw(c71.155,36.437) 71.481,36.762 ccw(c71.806,37.087) v1@71.806,36.627 ; 71.621,36.615 cw(c71.499,36.402) v1@71.743,36.43 ; 71.628,36.621 ccw(c71.84,36.744) v1@71.813,36.5
  Mid-Layer 1 w0.127: v1@71.806,36.246 cw(c71.806,35.786) 72.131,36.112 cw(c72.456,36.437) v1@71.996,36.437 ; v1(71.806,36.437) 82.093,26.15 82.093,13.614 87.427,8.28 v1(96.647,8.28) ; v1@96.512,8.146 ccw(c96.187,7.82) 96.187,8.28 ccw(c96.187,8.74) v1@96.512,8.415
  Bottom Layer w0.152: R39.1@96.421,7.759 ccw(c95.933,8.28) v1(96.647,8.28) ; v1@96.504,8.175 cw(c96.266,8) 96.551,7.923 cw(c96.837,7.847) v1@96.718,8.118 ; v1@96.521,8.155 cw(c96.218,7.851) 96.647,7.851 cw(c97.076,7.851) v1@96.773,8.155 ; R39.1@96.525,7.648 ccw(c96.263,7.929) 96.647,7.929 ccw(c97.031,7.929) R39.1@96.769,7.648 ; v1@96.576,8.118 cw(c96.457,7.847) 96.743,7.923 cw(c97.028,8) v1@96.79,8.175 ; R39.1@96.647,7.518 v1(96.647,8.28) ; R39.1@96.873,7.759 cw(c97.361,8.28) v1(96.647,8.28)
L1: J5.14 U3.L1 | length 42.2
  Top Layer w0.127: U3.L1@65.186,52.056 ccw(c64.868,52.375) 65.318,52.375 ccw(c65.768,52.375) U3.L1@65.45,52.056 ; U3.L1@65.318,51.925 65.318,60.416 70.383,65.481 70.383,74.016 68.656,75.743 J5.14@68.656,76.433 ; J5.14@68.454,76.433 ccw(c69.631,76.433) 68.799,75.6 ; J5.14@68.581,76.433 ccw(c70.065,76.433) 69.015,75.384 ; J5.14@68.708,76.433 ccw(c70.498,76.433) 69.232,75.167 ; J5.14@68.835,76.433 ccw(c70.932,76.433) 69.449,74.95 ; J5.14@68.962,76.433 ccw(c71.366,76.433) 69.666,74.733 ; J5.14@69.089,76.433 ccw(c71.799,76.433) 69.883,74.516 ; J5.14@69.216,76.433 ccw(c72.233,76.433) 70.099,74.3 ; J5.14@69.343,76.433 ccw(c72.666,76.433) 70.316,74.083
L2: J5.13 U3.L2 | length 38
  Top Layer w0.127: U3.L2@65.132,50.925 ccw(c64.681,50.925) 65,51.243 ccw(c65.318,51.561) U3.L2@65.318,51.111 ; U3.L2@65.318,50.925 64.846,51.396 64.846,60.935 69.647,65.735 69.647,73.685 67.564,75.768 67.564,77.881 J5.13@68.656,78.973 ; J5.13@67.971,78.938 cw(c66.578,78.867) 67.564,77.881 cw(c68.55,76.895) J5.13@68.621,78.287 ; J5.13@68.097,78.944 cw(c66.963,78.886) 67.766,78.083 cw(c68.57,77.279) J5.13@68.628,78.414 ; J5.13@68.224,78.951 cw(c67.347,78.906) 67.968,78.285 cw(c68.589,77.664) J5.13@68.634,78.541
L9: RN13.8 U3.L9 | length 60.5
  Top Layer w0.127: RN13.8@13.745,54.642 v1(14.7,54.642) ; RN13.8@14.142,54.545 cw(c14.375,54.312) 14.375,54.642 cw(c14.375,54.971) RN13.8@14.142,54.738 ; v1@14.566,54.507 ccw(c14.24,54.182) 14.24,54.642 ccw(c14.24,55.102) v1@14.566,54.776
  Top Layer w0.254: v1(64.818,43.425) U3.L9@65.318,43.925 ; v1@64.818,43.552 ccw(c64.818,43.858) 65.035,43.641 ccw(c65.252,43.425) v1@64.945,43.425 ; U3.L9@65.195,43.925 cw(c64.898,43.925) 65.108,43.715 cw(c65.318,43.505) U3.L9@65.318,43.802
  Mid-Layer 1 w0.127: 21.082,48.26 56.998,48.26 60.604,44.653 63.754,44.653 64.818,43.589 v1(64.818,43.425) ; 64.376,44.031 cw(c63.77,43.425) v1@64.627,43.425 ; 64.593,43.814 cw(c64.204,43.425) v1@64.754,43.425
  Mid-Layer 1 w0.152: v1@14.7,54.464 cw(c14.7,54.035) 15.004,54.338 cw(c15.307,54.642) v1@14.878,54.642 ; v1(14.7,54.642) 21.082,48.26
L10: RN13.7 U3.L10 | length 60.6
  Top Layer w0.127: RN13.7@13.745,53.842 v1(14.7,53.842) ; RN13.7@14.142,53.745 cw(c14.375,53.512) 14.375,53.842 cw(c14.375,54.171) RN13.7@14.142,53.938 ; v1@14.566,53.707 ccw(c14.24,53.382) 14.24,53.842 ccw(c14.24,54.302) v1@14.566,53.976
  Top Layer w0.254: v1(64.818,42.425) U3.L10@65.318,42.925 ; v1@64.818,42.552 ccw(c64.818,42.858) 65.035,42.641 ccw(c65.252,42.425) v1@64.945,42.425 ; U3.L10@65.195,42.925 cw(c64.898,42.925) 65.108,42.715 cw(c65.318,42.505) U3.L10@65.318,42.802
  Mid-Layer 1 w0.127: v1@14.7,53.651 cw(c14.7,53.191) 15.026,53.517 cw(c15.351,53.842) v1@14.891,53.842 ; v1(14.7,53.842) 20.765,47.777 56.845,47.777 60.223,44.399 63.5,44.399 64.338,43.561 64.338,42.904 v1(64.818,42.425) ; v1@64.627,42.425 ccw(c64.168,42.425) 64.493,42.75 ccw(c64.818,43.075) v1@64.818,42.615
  Bottom Layer w0.127: v1@14.7,53.753 v1(14.7,53.842)
LED0: RN34.4 U3.E10 | length 40.5
  Top Layer w0.127: v1@99.789,30.142 cw(c99.494,29.847) RN34.4@99.911,29.847 ; RN34.4@99.815,29.835 ccw(c99.582,30.068) 99.911,30.068 ccw(c100.241,30.068) RN34.4@100.008,29.835 ; v1@99.829,30.112 cw(c99.767,30.005) 99.886,29.974 cw(c100.071,29.924) v1@99.997,30.101 ; v1@99.85,30.101 cw(c99.798,29.98) 99.926,30.014 ; RN34.4@99.911,29.439 v1@99.911,30.277 ; RN34.4@99.911,29.787 cw(c100.413,29.787) v1@100.058,30.142
  Top Layer w0.254: U3.E10@71.318,42.802 cw(c71.318,42.505) 71.528,42.715 cw(c71.738,42.925) U3.E10@71.441,42.925 ; U3.E10@71.318,42.925 v1(71.818,42.425) ; v1@71.691,42.425 ccw(c71.384,42.425) 71.601,42.641 ccw(c71.818,42.858) v1@71.818,42.552
  Mid-Layer 1 w0.127: v1@71.818,42.488 cw(c71.821,41.897) 72.239,42.315 ; v1@71.819,42.234 cw(c71.826,41.041) 72.669,41.885 ; v1@71.818,42.361 cw(c71.823,41.469) 72.454,42.1 ; v1(71.818,42.425) 72.129,42.425 ; v1@71.988,42.338 cw(c72.129,42.265) 72.129,42.425 ; v1@71.988,42.511 ccw(c72.129,42.584) 72.129,42.425 ; v1@99.733,30.277 ccw(c99.273,30.277) 99.598,30.602 ccw(c99.924,30.927) v1@99.924,30.467 ; v1(99.924,30.277) 88.316,41.885 72.669,41.885 ; 72.129,42.425 72.669,41.885
LED1: RN34.3 U3.F9 | length 41.1
  Top Layer w0.127: v1@100.576,30.142 cw(c100.251,29.816) 100.711,29.816 cw(c101.17,29.817) v1@100.846,30.142 ; RN34.3@100.615,29.835 ccw(c100.382,30.068) 100.711,30.068 ccw(c101.041,30.068) RN34.3@100.808,29.835 ; v1@100.637,30.101 cw(c100.574,29.951) 100.731,29.993 cw(c100.819,30.017) 100.784,30.101 ccw(c100.847,29.952) 100.691,29.994 ccw(c100.604,30.017) v1@100.639,30.101 ; RN34.3@100.711,29.439 v1(100.711,30.277)
  Top Layer w0.254: U3.F9@70.318,43.802 cw(c70.318,43.505) 70.528,43.715 cw(c70.738,43.925) U3.F9@70.441,43.925 ; U3.F9@70.318,43.925 v1(70.818,43.425) ; v1@70.691,43.425 ccw(c70.384,43.425) 70.601,43.641 ccw(c70.818,43.858) v1@70.818,43.552
  Mid-Layer 1 w0.127: v1@70.818,43.234 cw(c70.818,42.774) 71.143,43.099 cw(c71.468,43.425) v1@71.009,43.425 ; v1(70.818,43.425) 71.367,42.875 88.113,42.875 v1(100.711,30.277) ; v1@100.52,30.277 ccw(c100.061,30.277) 100.386,30.602 ccw(c100.711,30.927) v1@100.711,30.467
LED2: RN34.2 U3.C9 | length 38.6
  Top Layer w0.127: v1@101.364,30.117 cw(c101.008,29.761) RN34.2@101.511,29.761 ; RN34.2@101.415,29.835 ccw(c101.182,30.068) 101.511,30.068 ccw(c101.841,30.068) RN34.2@101.608,29.835 ; v1@101.437,30.071 cw(c101.387,29.921) 101.54,29.962 cw(c101.645,29.99) v1@101.592,30.085 ; RN34.2@101.511,29.439 v1@101.511,30.251 ; RN34.2@101.511,29.822 cw(c101.927,29.822) v1@101.633,30.117
  Top Layer w0.254: U3.C9@73.318,43.802 cw(c73.318,43.505) 73.528,43.715 cw(c73.738,43.925) U3.C9@73.441,43.925 ; U3.C9@73.318,43.925 v1(73.818,43.425) ; v1@73.691,43.425 ccw(c73.384,43.425) 73.601,43.641 ccw(c73.818,43.858) v1@73.818,43.552
  Mid-Layer 1 w0.127: v1(73.818,43.425) 88.325,43.425 v1(101.498,30.251) ; v1@73.953,43.29 cw(c74.278,42.965) 74.278,43.425 cw(c74.278,43.884) v1@73.953,43.559 ; v1@101.308,30.251 ccw(c100.848,30.251) 101.173,30.577 ccw(c101.498,30.902) v1@101.498,30.442
LED3: RN34.1 U3.D9 | length 40.7
  Top Layer w0.127: v1@102.151,30.117 cw(c101.826,29.791) 102.286,29.791 cw(c102.746,29.791) v1@102.421,30.117 ; RN34.1@102.215,29.835 ccw(c102.043,30.007) v1@102.286,30.007 ; v1@102.235,30.068 cw(c102.199,29.94) 102.327,29.974 cw(c102.419,29.999) v1@102.375,30.083 ; RN34.1@102.286,29.464 v1(102.286,30.251) ; v1@102.286,30.129 ccw(c102.702,30.129) RN34.1@102.408,29.835
  Top Layer w0.254: U3.D9@72.318,43.802 cw(c72.318,43.505) 72.528,43.715 cw(c72.738,43.925) U3.D9@72.441,43.925 ; U3.D9@72.318,43.925 v1(72.818,43.425) ; v1@72.691,43.425 ccw(c72.384,43.425) 72.601,43.641 ccw(c72.818,43.858) v1@72.818,43.552
  Mid-Layer 1 w0.127: v1(72.818,43.425) 73.285,43.891 88.646,43.891 v1(102.286,30.251) ; v1@72.818,43.615 ccw(c72.818,44.075) 73.143,43.75 ccw(c73.468,43.425) v1@73.009,43.425 ; v1@102.095,30.251 ccw(c101.635,30.251) 101.961,30.577 ccw(c102.286,30.902) v1@102.286,30.442
LED_A: RN14.2 U13.11 | length 21.2
  Top Layer w0.305: U13.11@37.973,23.317 cw(c37.973,21.845) 39.014,22.886 cw(c40.054,23.927) U13.11@38.583,23.927 ; U13.11@37.973,23.927 40.919,20.98 45.796,20.98 47.561,22.746 RN14.2@47.561,30.099
LED_B: RN10.4 U13.7 | length 22.8
  Top Layer w0.305: U13.7@45.593,13.767 47.142,13.767 53.479,20.104 RN10.4@53.479,30.099 ; U13.7@46.024,13.336 cw(c47.065,12.295) 47.065,13.767 cw(c47.065,15.239) U13.7@46.024,14.198
LED_C: RN10.2 U13.4 | length 28.2
  Top Layer w0.305: U13.4@37.973,13.767 40.284,16.078 46.736,16.078 51.879,21.222 RN10.2@51.879,30.099 ; U13.4@37.973,14.376 ccw(c37.973,15.848) 39.014,14.807 ccw(c40.054,13.767) U13.4@38.583,13.767
LED_D: RN14.3 U13.1 | length 31.8
  Top Layer w0.305: U13.1@30.353,13.767 36.347,19.761 46.101,19.761 48.361,22.022 RN14.3@48.361,30.099 ; U13.1@30.353,14.376 ccw(c30.353,15.848) 31.394,14.807 ccw(c32.434,13.767) U13.1@30.963,13.767
LED_E: RN10.1 U13.3 | length 29.6
  Top Layer w0.305: U13.3@35.433,13.767 38.837,17.17 46.457,17.17 51.079,21.793 RN10.1@51.079,30.099 ; U13.3@35.433,14.376 ccw(c35.433,15.848) 36.474,14.807 ccw(c37.514,13.767) U13.3@36.043,13.767
LED_F: RN14.1 U13.10 | length 16.3
  Top Layer w0.305: U13.10@40.513,23.317 cw(c40.513,21.845) 41.554,22.886 cw(c42.594,23.927) U13.10@41.123,23.927 ; U13.10@40.513,23.927 42.088,22.352 45.72,22.352 46.761,23.393 RN14.1@46.761,30.099
LED_G: RN10.3 U13.6 | length 24.3
  Top Layer w0.305: U13.6@43.053,13.767 44.425,15.138 47.269,15.138 52.679,20.548 RN10.3@52.679,30.099 ; U13.6@43.053,14.376 ccw(c43.053,15.848) 44.094,14.807 ccw(c45.134,13.767) U13.6@43.663,13.767
LED_H: RN14.4 U13.2 | length 30.5
  Top Layer w0.305: U13.2@32.893,13.767 37.668,18.542 46.457,18.542 49.161,21.247 RN14.4@49.161,30.099 ; U13.2@32.893,14.376 ccw(c32.893,15.848) 33.934,14.807 ccw(c34.974,13.767) U13.2@33.503,13.767
M1: J5.7 U3.M1 | length 48.1
  Top Layer w0.127: U3.M1@64.186,52.056 ccw(c63.868,52.375) 64.318,52.375 ccw(c64.768,52.375) U3.M1@64.45,52.056 ; U3.M1@64.318,51.925 64.318,61.519 66.269,63.469 66.269,68.402 64.897,69.774 64.897,79.324 65.816,80.243 75.006,80.243 J5.7@76.276,78.973 ; J5.7@75.59,78.973 ccw(c73.932,78.973) 75.104,80.145 ccw(c76.276,81.317) J5.7@76.276,79.659 ; J5.7@75.717,78.973 ccw(c74.366,78.973) 75.321,79.928 ccw(c76.276,80.883) J5.7@76.276,79.532 ; J5.7@75.844,78.973 ccw(c74.8,78.973) 75.538,79.711 ccw(c76.276,80.45) J5.7@76.276,79.405
M6: J5.16 U3.M6 | length 52.6
  Top Layer w0.127: J5.16@65.837,76.154 J5.16@66.116,76.433
  Top Layer w0.254: v1@63.818,47.298 cw(c63.818,46.991) 64.035,47.208 cw(c64.252,47.425) v1@63.945,47.425 ; v1(63.818,47.425) U3.M6@64.318,46.925 ; U3.M6@64.195,46.925 ccw(c63.898,46.925) 64.108,47.135 ccw(c64.318,47.345) U3.M6@64.318,47.048
  Mid-Layer 1 w0.127: 63.307,48.199 cw(c62.532,47.425) v1@63.627,47.425 ; 63.523,47.983 cw(c62.965,47.425) v1@63.754,47.425 ; 63.74,47.766 cw(c63.399,47.425) v1@63.881,47.425 ; v1@63.758,47.606 ccw(c63.731,47.688) 63.818,47.688 ; v1(63.818,47.425) 63.818,47.688 ; v1@63.878,47.606 cw(c63.905,47.688) 63.818,47.688 ; 64.384,73.909 ccw(c61.861,76.433) J5.16@65.43,76.433 ; 64.601,74.126 ccw(c62.294,76.433) J5.16@65.557,76.433 ; 64.818,74.343 ccw(c62.728,76.433) J5.16@65.684,76.433 ; 65.035,74.56 ccw(c63.162,76.433) J5.16@65.811,76.433 ; 65.252,74.777 ccw(c63.595,76.433) J5.16@65.938,76.433 ; 65.468,74.993 ccw(c64.029,76.433) J5.16@66.065,76.433 ; 65.685,75.21 ccw(c64.462,76.433) J5.16@66.192,76.433 ; 65.902,75.427 ccw(c64.896,76.433) J5.16@66.319,76.433 ; J5.16@66.019,75.753 cw(c66.003,75.641) 66.116,75.641 ; J5.16@66.116,76.433 66.116,75.641 ; 66.119,75.644 ccw(c65.33,76.433) J5.16@66.446,76.433 ; J5.16@66.213,75.753 ccw(c66.23,75.641) 66.116,75.641 ; 63.818,47.688 63.297,48.209 63.297,49.581 62.916,49.962 62.509,49.962 62.179,50.292 62.179,71.704 66.116,75.641
M7: J5.18 U3.M7 | length 40.4
  Top Layer w0.254: v1@63.818,46.298 cw(c63.818,45.991) 64.035,46.208 cw(c64.252,46.425) v1@63.945,46.425 ; v1(63.818,46.425) U3.M7@64.318,45.925 ; U3.M7@64.195,45.925 ccw(c63.898,45.925) 64.108,46.135 ccw(c64.318,46.345) U3.M7@64.318,46.048
  Mid-Layer 1 w0.127: J5.18@62.89,76.433 cw(c61.232,76.433) 62.404,75.261 cw(c63.576,74.089) J5.18@63.576,75.747 ; J5.18@63.017,76.433 cw(c61.666,76.433) 62.621,75.478 cw(c63.576,74.523) J5.18@63.576,75.874 ; J5.18@63.144,76.433 cw(c62.1,76.433) 62.838,75.695 cw(c63.576,74.956) J5.18@63.576,76.001 ; J5.18@63.576,76.433 61.316,74.172 61.316,49.225 61.62,48.92 62.027,48.92 62.306,48.641 62.306,48.235 62.636,47.904 62.992,47.904 63.348,47.549 63.348,47.015 63.818,46.545 v1(63.818,46.425)
M9: RN13.6 U3.M9 | length 58.4
  Top Layer w0.127: RN13.6@13.745,53.042 v1(14.713,53.042) ; RN13.6@14.142,52.945 cw(c14.375,52.712) 14.375,53.042 cw(c14.375,53.371) RN13.6@14.142,53.138 ; v1@14.578,52.907 ccw(c14.253,52.582) 14.253,53.042 ccw(c14.253,53.502) v1@14.578,53.176
  Top Layer w0.254: v1(63.818,43.425) U3.M9@64.318,43.925 ; v1@63.818,43.552 ccw(c63.818,43.858) 64.035,43.641 ccw(c64.252,43.425) v1@63.945,43.425 ; U3.M9@64.195,43.925 cw(c63.898,43.925) 64.108,43.715 cw(c64.318,43.505) U3.M9@64.318,43.802
  Mid-Layer 1 w0.127: v1@14.713,52.851 cw(c14.713,52.391) 15.038,52.717 cw(c15.364,53.042) v1@14.904,53.042 ; v1(14.713,53.042) 19.495,48.26 20.435,47.32 56.617,47.32 59.792,44.145 63.097,44.145 v1(63.818,43.425) ; v1@63.627,43.425 ccw(c63.168,43.425) 63.493,43.75 ccw(c63.818,44.075) v1@63.818,43.615
N2: RN11.6 U3.N2 | length 57.5
  Top Layer w0.127: RN11.6@13.945,61.443 14.249,61.443 ; RN11.6@14.045,61.306 cw(c14.045,60.484) 14.626,61.066 ; RN11.6@14.045,61.433 cw(c14.045,60.918) 14.41,61.282 ; RN11.6@14.171,61.391 cw(c14.249,61.359) 14.249,61.443 ; RN11.6@14.171,61.495 ccw(c14.249,61.527) 14.249,61.443 ; U3.N2@63.132,50.925 ccw(c62.681,50.925) 63,51.243 ccw(c63.318,51.561) U3.N2@63.318,51.111 ; U3.N2@63.318,50.925 62.814,51.428 62.814,54.483 57.988,59.309 16.383,59.309 14.249,61.443
N5: J5.15 U3.N5 | length 42.1
  Top Layer w0.254: v1@62.818,48.298 cw(c62.818,47.991) 63.035,48.208 cw(c63.252,48.425) v1@62.945,48.425 ; v1(62.818,48.425) U3.N5@63.318,47.925 ; U3.N5@63.195,47.925 ccw(c62.898,47.925) 63.108,48.135 ccw(c63.318,48.345) U3.N5@63.318,48.048
  Mid-Layer 1 w0.127: 62.36,49.069 cw(c61.716,48.425) v1@62.627,48.425 ; 62.577,48.853 cw(c62.149,48.425) v1@62.754,48.425 ; v1(62.818,48.425) 62.818,48.612 62.332,49.098 62.332,49.708 61.671,50.368 61.671,72.389 64.897,75.615 64.897,77.754 J5.15@66.116,78.973 ; J5.15@65.43,78.973 cw(c63.772,78.973) 64.944,77.801 cw(c66.116,76.629) J5.15@66.116,78.287 ; J5.15@65.557,78.973 cw(c64.206,78.973) 65.161,78.018 cw(c66.116,77.063) J5.15@66.116,78.414 ; J5.15@65.684,78.973 cw(c64.64,78.973) 65.378,78.235 cw(c66.116,77.496) J5.15@66.116,78.541
N6: J5.17 U3.N6 | length 44.6
  Top Layer w0.254: v1@62.818,47.298 cw(c62.818,46.991) 63.035,47.208 cw(c63.252,47.425) v1@62.945,47.425 ; v1(62.818,47.425) U3.N6@63.318,46.925 ; U3.N6@63.195,46.925 ccw(c62.898,46.925) 63.108,47.135 ccw(c63.318,47.345) U3.N6@63.318,47.048
  Mid-Layer 1 w0.127: 62.254,47.703 ccw(c62.775,48.224) v1@62.815,47.488 ; 62.455,47.502 ccw(c62.796,47.842) v1@62.821,47.361 ; v1@62.642,47.351 ccw(c62.532,47.305) 62.532,47.425 ; v1@62.642,47.498 cw(c62.532,47.544) 62.532,47.425 ; v1@62.808,47.615 cw(c62.755,48.607) 62.052,47.904 ; v1(62.818,47.425) 62.532,47.425 ; J5.17@62.89,78.973 cw(c61.232,78.973) 62.404,77.801 cw(c63.576,76.629) J5.17@63.576,78.287 ; J5.17@63.017,78.973 cw(c61.666,78.973) 62.621,78.018 cw(c63.576,77.063) J5.17@63.576,78.414 ; J5.17@63.144,78.973 cw(c62.1,78.973) 62.838,78.235 cw(c63.576,77.496) J5.17@63.576,78.541 ; J5.17@63.576,78.973 60.3,75.696 60.3,49.174 61.57,47.904 62.052,47.904 ; 62.052,47.904 62.532,47.425
NCE: R12.1 U3.J3 | length 4.8
  Top Layer w0.254: v1@66.818,50.298 cw(c66.818,49.991) 67.035,50.208 cw(c67.252,50.425) v1@66.945,50.425 ; v1(66.818,50.425) U3.J3@67.318,49.925 ; U3.J3@67.195,49.925 ccw(c66.898,49.925) 67.108,50.135 ccw(c67.318,50.345) U3.J3@67.318,50.048
  Bottom Layer w0.254: R12.1@66.454,51.057 cw(c66,50.593) v1@66.65,50.593 ; R12.1@66.549,50.968 ccw(c67.238,51.152) v1@66.881,50.535 ; R12.1@66.65,51.138 ccw(c67.531,51.138) v1@66.908,50.514 ; R12.1@66.65,51.257 v1@66.65,50.593 ; v1(66.818,50.425) v1@66.65,50.593 ; R12.1@66.845,51.057 ccw(c67.299,50.593) v1@66.65,50.593
NCONFIG: R10.2 U3.H5 | length 4.9
  Top Layer w0.254: U3.H5@68.318,47.925 v1(68.818,48.425) ; U3.H5@68.318,48.048 ccw(c68.318,48.345) 68.528,48.135 ccw(c68.738,47.925) U3.H5@68.441,47.925 ; v1@68.691,48.425 cw(c68.384,48.425) 68.601,48.208 cw(c68.818,47.991) v1@68.818,48.298
  Bottom Layer w0.203: v1(68.818,48.425) 69.335,48.942 69.335,51.225 R10.2@69.52,51.41
NCSO: U3.D2 U8.1 | length 38
  Top Layer w0.127: U3.D2@72.318,50.925 72.822,51.428 72.822,52.451 74.092,53.721 91.237,53.721 92.532,55.016 92.532,63.449 89.306,66.675 U8.1@88.773,66.675 ; U3.D2@72.318,51.111 ccw(c72.318,51.561) 72.636,51.243 ccw(c72.955,50.925) U3.D2@72.505,50.925 ; U8.1@89.23,66.434 cw(c89.23,65.667) 89.772,66.209 ; U8.1@89.23,66.561 cw(c89.23,66.101) 89.555,66.426 ; U8.1@89.471,66.675 ccw(c89.87,66.675) 89.588,66.393
NetC1_1: C1.1 C2.1 R2.2 U4.6 | length 14.1
  Top Layer w0.127: C1.1@14.402,73.228 C1.1@14.63,73.457
  Top Layer w0.254: R2.2@12.548,71.374 C1.1@14.364,73.19 ; R2.2@12.548,71.653 ccw(c12.548,72.328) 13.025,71.851 ccw(c13.502,71.374) R2.2@12.827,71.374 ; 13.795,72.621 ccw(c13.188,73.228) C1.1@14.046,73.228 ; C2.1@13.95,74.475 cw(c13.044,73.569) C1.1@14.326,73.569 ; 13.979,72.805 cw(c14.326,72.458) C1.1@14.326,72.949 ; C1.1@14.128,73.426 ccw(c13.651,73.903) 14.326,73.903 ccw(c15,73.903) 14.523,73.426 ccw(c15,73.903) 15,73.228 ccw(c15,72.554) C1.1@14.523,73.031 ; C2.1@14.13,74.655 cw(c13.657,74.183) 14.326,74.183 ; C1.1@14.326,73.228 14.326,74.574 C2.1@14.63,74.879 ; 14.326,73.937 cw(c15.087,73.937) C2.1@14.549,74.475 ; C1.1@14.402,73.228 15.316,73.228 16.296,72.248 U4.6@16.296,71.476
NetC3_1: C3.1 C46.1 L1.2 R75.2 X1.4 | length 3.4
  Top Layer w0.508: C3.1@87.401,57.963 87.401,58.191 87.952,58.742 88.333,58.742 R75.2@89.357,59.766 ; C3.1@87.465,57.963 cw(c88.17,57.963) 87.671,58.461
NetC41_1: C41.1 J4.13 R30.1 | length 39
  Top Layer w0.305: R30.1@84.201,72.212 87.122,75.133 87.122,79.502 91.211,83.591 103.53,83.591 J4.13@105.029,82.093 ; R30.1@84.201,72.466 ccw(c84.201,73.079) 84.635,72.646 ccw(c85.068,72.212) R30.1@84.455,72.212 ; J4.13@104.318,82.093 ccw(c102.601,82.093) 103.815,83.307 ccw(c105.029,84.521) J4.13@105.029,82.804 ; J4.13@104.623,82.093 ccw(c103.641,82.093) 104.335,82.787 ccw(c105.029,83.48) J4.13@105.029,82.499
  Bottom Layer w0.508: J4.13@104.598,82.524 ccw(c103.557,83.565) 105.029,83.565 ccw(c106.501,83.565) J4.13@105.46,82.524 ; J4.13@105.029,82.093 C41.1@105.029,84.811
NetC42_1: C42.1 J4.14 R31.1 | length 43.9
  Top Layer w0.305: R31.1@82.398,72.212 86.03,75.844 86.03,79.959 90.907,84.836 104.572,84.836 J4.14@107.315,82.093 ; R31.1@82.398,72.466 ccw(c82.398,73.079) 82.831,72.646 ccw(c83.265,72.212) R31.1@82.652,72.212 ; J4.14@106.604,82.093 ccw(c104.887,82.093) 106.101,83.307 ccw(c107.315,84.521) J4.14@107.315,82.804 ; J4.14@106.909,82.093 ccw(c105.927,82.093) 106.621,82.787 ccw(c107.315,83.48) J4.14@107.315,82.499
  Bottom Layer w0.508: J4.14@106.884,82.524 ccw(c105.843,83.565) 107.315,83.565 ccw(c108.787,83.565) J4.14@107.746,82.524 ; J4.14@107.315,82.093 C42.1@107.315,84.836
NetCB1_2: CB1.2 R33.1 | length 9.8
  Top Layer w0.254: CB1.2@86.466,37.476 ccw(c87.363,38.102) 87.363,37.008 ; CB1.2@86.487,37.49 86.97,37.008 R33.1@88.824,37.008 cw(c88.824,39.12) CB1.2@87.091,37.912 ; CB1.2@86.675,37.621 ccw(c87.85,38.441) 87.85,37.008 ; CB1.2@86.883,37.766 ccw(c88.337,38.781) 88.337,37.008 ; R33.1@88.626,36.81 ccw(c88.149,36.333) 88.149,37.008 ccw(c88.149,37.682) R33.1@88.626,37.205
NetD5_2: D5.2 LS1.1 R34.2 | length 21.4
  Top Layer w0.381: R34.2@97.282,37.643 cw(c96.913,37.274) 97.434,37.274 cw(c97.956,37.274) 97.587,37.643 cw(c97.956,37.274) 97.956,37.795 cw(c97.956,38.316) R34.2@97.587,37.948 ; R34.2@97.315,37.615 cw(c97.038,37.196) 97.531,37.296 ; 97.434,35.928 ccw(c99.403,35.928) D5.2@98.011,34.536 ; 97.434,36.848 ccw(c100.322,36.848) D5.2@98.28,34.806 ; R34.2@97.434,37.768 ccw(c101.242,37.768) D5.2@98.55,35.075 ; 97.536,37.27 cw(c98.065,37.378) R34.2@97.615,37.676 ; D5.2@98.146,34.671 97.434,35.382 R34.2@97.434,37.795 LS1.1@101.981,37.795 ; 99.88,37.795 ccw(c99.88,40.048) LS1.1@101.473,38.455 ; 100.248,37.795 cw(c100.248,36.062) LS1.1@101.473,37.288 ; 100.8,37.795 ccw(c100.8,39.128) LS1.1@101.743,38.186
NetF1_2: F1.2 SW1.2 SW1.5